# Altium PCB BLDC_driver.PcbDoc
Units mm, origin at the board's own origin, x right, y up, seen from the top; angles counter-clockwise.
Board outline 50 x 40 mm, 2 copper layers (Top Layer, Bottom Layer); 11 components, 13 nets, 44 pads, 32 vias.
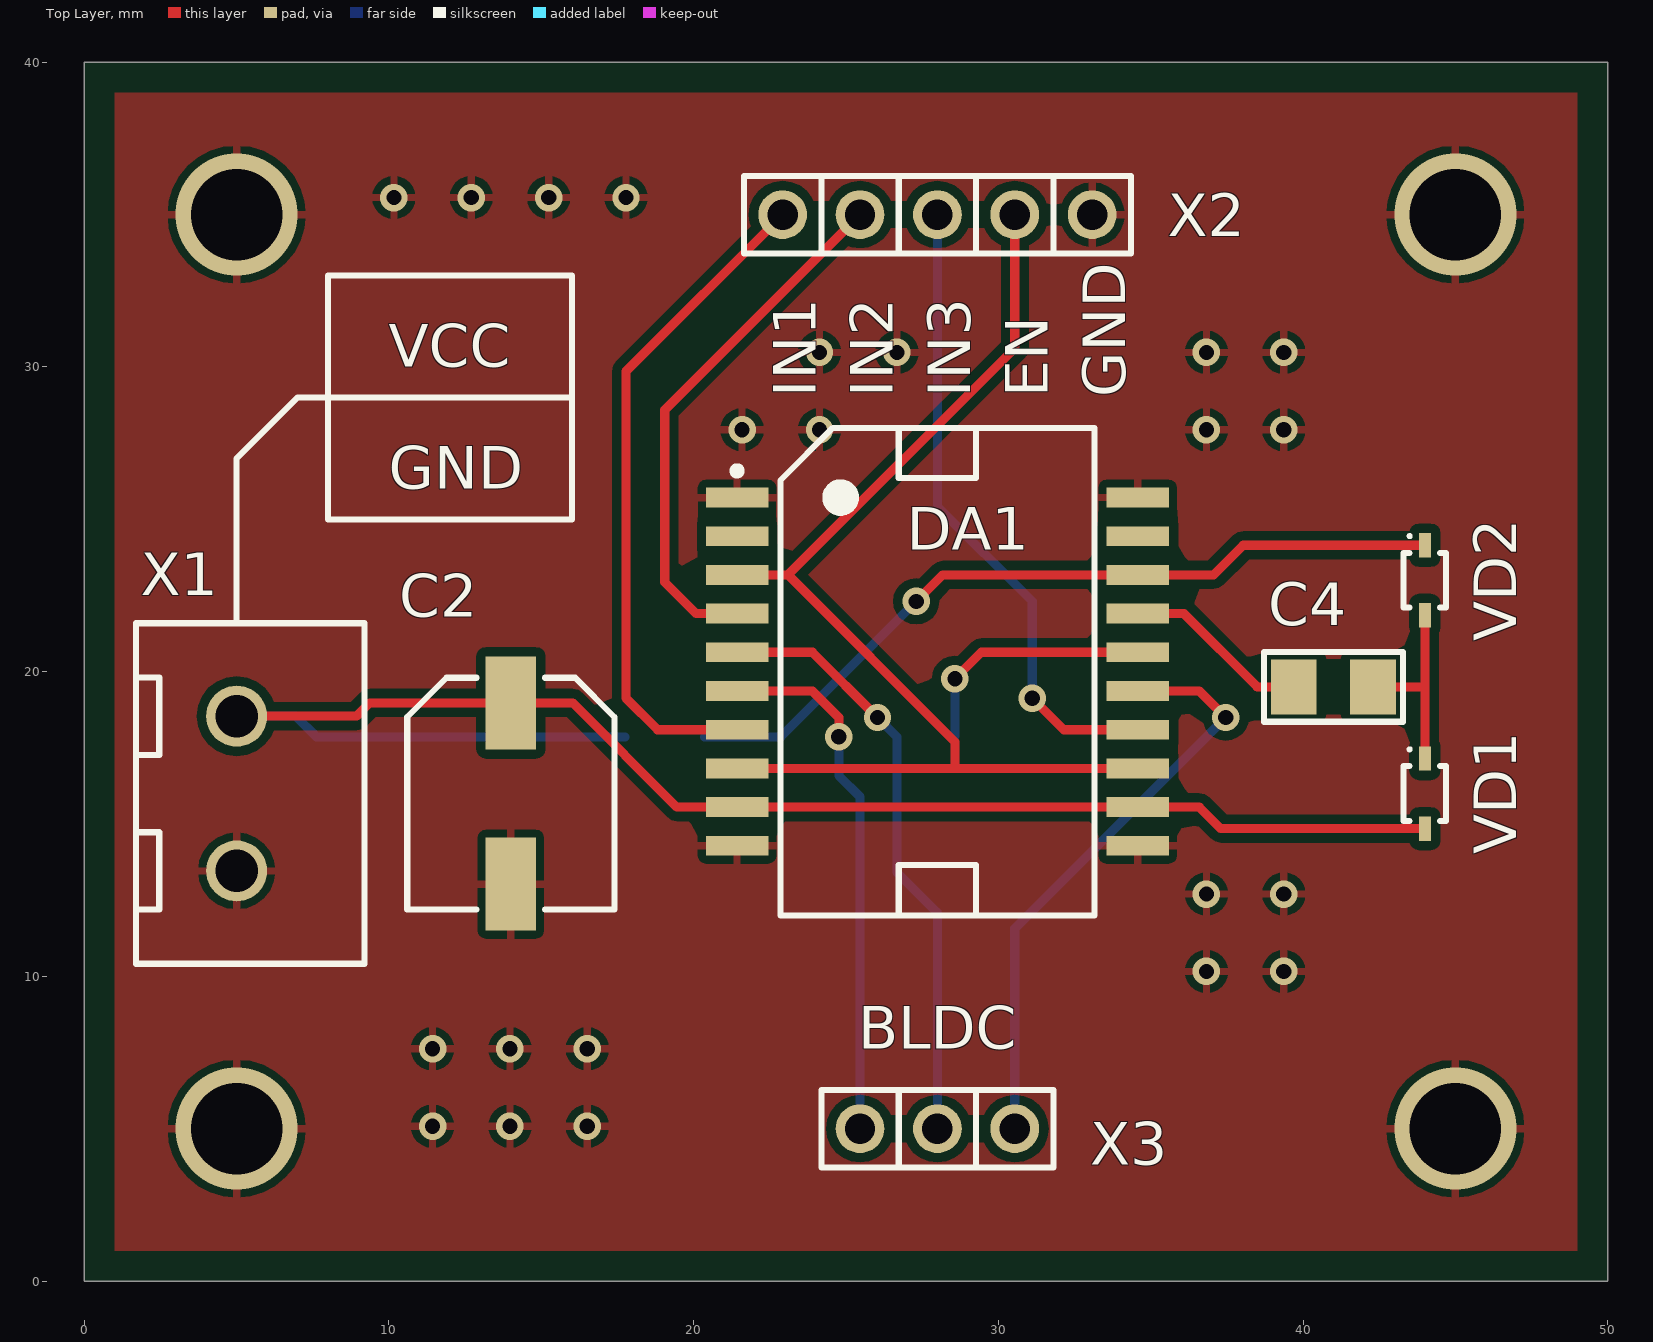
[diagram p0: Top Layer view]
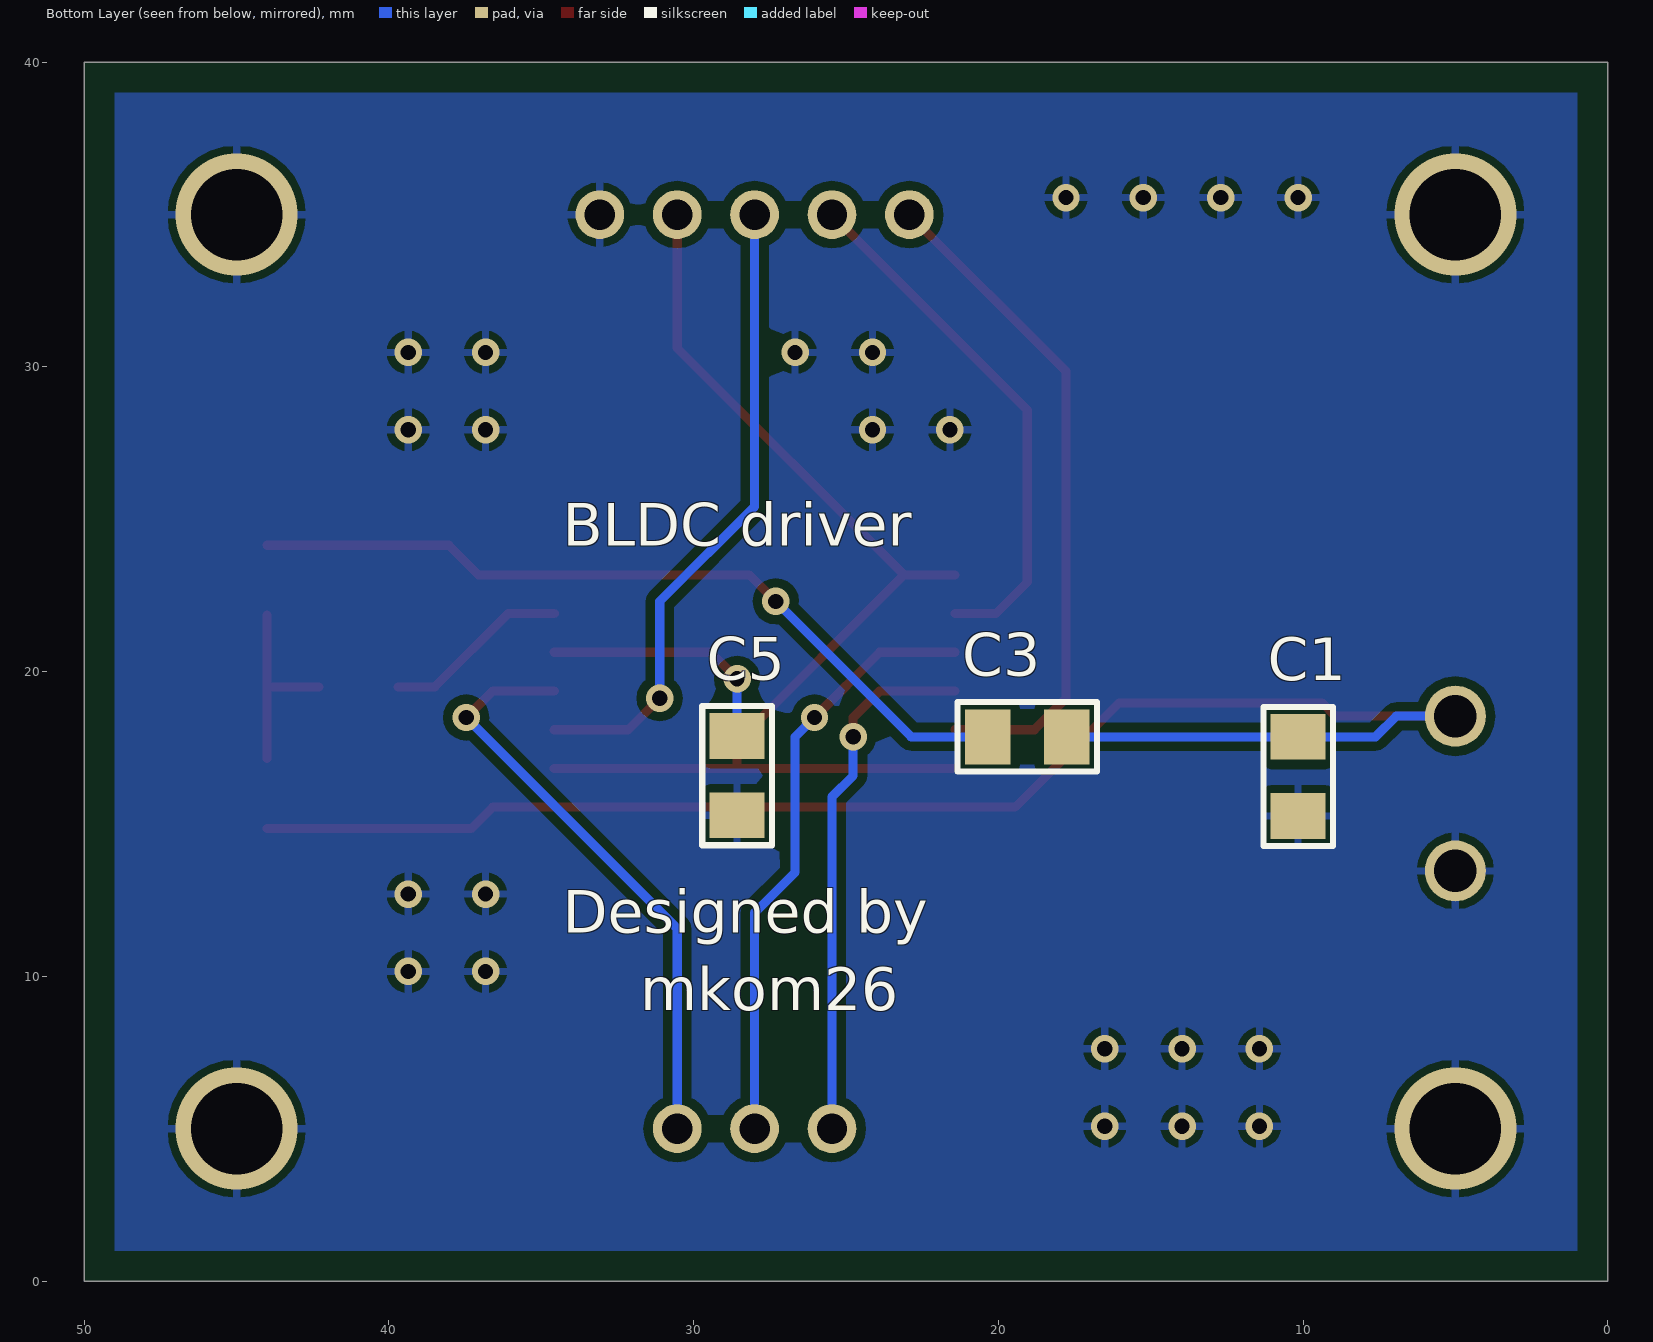
[diagram p1: Bottom Layer view, seen from below]

## Layer stack, top to bottom
Top Solder: solder mask 0.0102, Solder Resist, Dk 3.5
Top Layer: signal copper 0.0356
Dielectric 1: dielectric 0.32, FR-4, Dk 4.8
Bottom Layer: signal copper 0.0356
Bottom Solder: solder mask 0.0102, Solder Resist, Dk 3.5

## Board outline
0,0 50,0 50,40 0,40

## Design rules (kind name [scope] priority, off if disabled: settings)
Clearance [All] p1: gap=0.3 ignorepadtopadclearanceinfootprint=FALSE
HoleSize [All] p1: absolutevalues=TRUE maxlimit=3 minlimit=0.025 maxpercent=80.000 minpercent=20.000
PlaneConnect [All] p1: planeconnectstyle=Relief reliefexpansion=0.6 reliefentries=4 reliefconductorwidth=0.3 reliefairgap=0.3
PolygonConnect [All] p1: connectstyle=Relief reliefconductorwidth=0.254 reliefentries=4 polygonreliefangle="90 Angle" airgapwidth=0.254
RoutingVias [All] p1: holewidth=0.711 width=1.27 viastyle="Through Hole" minholewidth=0.711 minwidth=1.27 maxholewidth=3 maxwidth=4
SMDEntry [All] p1: side=TRUE corner=FALSE anyangle=FALSE
SilkToSolderMaskClearance [IsPad] p1: minsilkscreentomaskgap=0.1 clearancetoexposedcopper=TRUE
SolderMaskExpansion [All] p1: expansion=0.102
Width [All] p1: maxlimit=0.3 minlimit=0.3 preferedwidth=0.3
27 further rules are at their usual default settings.

## Components (designator, comment, footprint, x,y, rotation, side; value= is the part's Value field where it differs from the comment)
C1 "C_0.1uF" CAP_1206 10.16,16.56 r90 bottom
C2 "C_POL_100uF_25V" CAP_EL_100uF_25V 14,16 r270 top
C3 "C_0.22uF" CAP_1206 19.05,17.86 r0 bottom
C4 "C_10nF" CAP_1206 41,19.5 r0 top
C5 "C_1uF" CAP_1206 28.575,16.59 r90 bottom
DA1 "L6234PD" POWERSO-20 28,20 r0 top
VD1 "VD_1N4148WS" SOD323 44,16 r90 top
VD2 "VD_1N4148WS" SOD323 44,23 r90 top
X1 "TERMINAL_BLOCK" Terminal_Block_2x 5,16 r270 top
X2 "PLS5" PLS5 28,35 r0 top
X3 "PLS3" PLS3 28,5 r0 top

## Footprints (in the part's own frame and the unit in brackets; to place one, negate y for a bottom-side part, rotate by r counter-clockwise, add the part's x,y. Pads: shape width x height; smd on the part's side, far side on the other; paste and mask are expansions set on the pad)
CAP_1206 [mm] "Chip Capacitor, 2-Leads, Body 3,20x1,60mm, IPC Medium Density"
  rect 1.5x1.8 smd: 1(-1.3,0) 2(1.3,0)
  silkscreen extent -2.29,-1.14 2.29,1.14, body extent -1.7,-0.9 1.7,0.9, height 1.25
CAP_EL_100uF_25V [mm] "Aluminum Electrolytic Capacitor, Body 7,50x6,60x8,00mm, IPC Medium Density"
  rect 3.05x1.65 smd: 1(-2.975,0) 2(2.975,0)
  silkscreen extent -3.8,-3.4 3.8,3.4, body extent -3.9,-3.4 3.9,3.4, height 8
PLS3 [mm]
  round 1.6 hole 1: 1(-2.54,0) 2(0,0) 3(2.54,0)
  silkscreen extent -3.81,-1.27 3.81,1.27, body extent -3.81,-1.27 3.81,1.27, height 8.44
PLS5 [mm]
  round 1.6 hole 1: 1(-5.08,0) 2(-2.54,0) 3(0,0) 4(2.54,0) 5(5.08,0)
  silkscreen extent -6.35,-1.27 6.35,1.27, body extent -6.35,-1.27 6.35,1.27, height 8.44
POWERSO-20 [mm] "POWERSO, 20-Leads, Body 15,90x11,00mm, Pitch 1,27mm, IPC Medium Density"
  rect 2.05x0.65 smd: 1(-6.575,5.715) 2(-6.575,4.445) 3(-6.575,3.175) 4(-6.575,1.905) 5(-6.575,0.635) 6(-6.575,-0.635) 7(-6.575,-1.905) 8(-6.575,-3.175) 9(-6.575,-4.445) 10(-6.575,-5.715) 11(6.575,-5.715) 12(6.575,-4.445) 13(6.575,-3.175) 14(6.575,-1.905) 15(6.575,-0.635) 16(6.575,0.635) 17(6.575,1.905) 18(6.575,3.175) 19(6.575,4.445) 20(6.575,5.715)
  silkscreen extent -6.7,-8 5.15,8, body extent -7.21,-8 7.19,8, height 3.6
SOD323 [mm] "SOD323, 2-Leads, Body 1,30x2,50mm, IPC Medium Density"
  rect 0.8x0.4 smd: 1(-1.15,0) 2(1.15,0)
  silkscreen extent -0.9,-0.7 1.5,0.7, body extent -1.25,-0.7 1.25,0.7, height 1.05
Terminal_Block_2x [mm]
  round 2 hole 1.4: 1(-2.54,0) 2(2.54,0)
  silkscreen extent -5.59,-3.3 5.59,4.19, body extent -5.58,-3.31 5.58,4.19, height 10

## Via types
v1: diameter 0.9, hole 0.5, Top Layer to Bottom Layer, 28 vias
v2: diameter 4, hole 3, Top Layer to Bottom Layer, 4 vias

## Nets (pads, with @x,y where several pads share a name; then routed paths per layer and width w, separated by ;. In a path a pad name is that pad's centre, name@x,y a point inside that pad or via, vN(x,y) a via of type N, cw(c..) or ccw(c..) an arc to the next point about the centre after c; other vN are vias at no path point)
ENABLE: DA1.3 DA1.8 DA1.13 X2.4 | length 38.3
  Top Layer w0.3: DA1.8 28.575,16.825 ; DA1.3 23.095,23.175 ; X2.4 30.54,30.62 23.095,23.175 ; DA1.13 28.575,16.825 ; 23.095,23.175 28.575,17.695 28.575,16.825
GND: C1.1 C2.2 C5.1 DA1.1 DA1.10 DA1.11 DA1.20 X1.2 X2.5
  other v1: 11.43,5.08 13.97,5.08 16.51,5.08 11.43,7.62 13.97,7.62 16.51,7.62 36.83,10.16 39.37,10.16 36.83,12.7 39.37,12.7 21.59,27.94 24.13,27.94 36.83,27.94 39.37,27.94 24.13,30.48 26.67,30.48 36.83,30.48 39.37,30.48 10.16,35.56 12.7,35.56 15.24,35.56 17.78,35.56
  other v2: 5,5 45,5 5,35 45,35
IN1: DA1.7 X2.1 | length 22.1
  Top Layer w0.3: DA1.7 18.815,18.095 17.78,19.13 17.78,29.86 X2.1
IN2: DA1.4 X2.2 | length 17.5
  Top Layer w0.3: DA1.4 20.085,21.905 19.05,22.94 19.05,28.59 X2.2
IN3: DA1.14 X2.3 | length 21
  Top Layer w0.3: v1(31.115,19.13) 32.15,18.095 DA1.14
  Bottom Layer w0.3: X2.3 28,25.42 31.115,22.305 v1(31.115,19.13)
NetC3_2: C3.2 DA1.18 VD2.2 | length 26.3
  Top Layer w0.3: v1(27.305,22.305) 28.175,23.175 DA1.18 37.065,23.175 38.04,24.15 VD2.2
  Bottom Layer w0.3: C3.2 22.86,17.86 v1(27.305,22.305)
NetC4_1: C4.1 DA1.17 | length 6.1
  Top Layer w0.3: DA1.17 36.095,21.905 38.5,19.5 C4.1
NetC4_2: C4.2 VD1.2 VD2.1 | length 6.4
  Top Layer w0.3: C4.2 44,19.5 ; VD1.2 44,19.5 ; VD2.1 44,19.5
NetC5_2: C5.2 DA1.16 | length 8.2
  Top Layer w0.3: v1(28.575,19.765) 29.445,20.635 DA1.16
  Bottom Layer w0.3: C5.2 v1(28.575,19.765)
OUT1: DA1.6 X3.1 | length 17.5
  Top Layer w0.3: DA1.6 23.895,19.365 24.765,18.495 v1(24.765,17.86)
  Bottom Layer w0.3: v1(24.765,17.86) 24.765,16.59 25.46,15.895 X3.1
OUT2: DA1.5 X3.2 | length 19.8
  Top Layer w0.3: DA1.5 23.895,20.635 v1(26.035,18.495)
  Bottom Layer w0.3: v1(26.035,18.495) 26.67,17.86 26.67,13.415 28,12.085 X3.2
OUT3: DA1.15 X3.3 | length 19.6
  Top Layer w0.3: DA1.15 36.595,19.365 v1(37.465,18.495)
  Bottom Layer w0.3: X3.3 30.54,11.57 v1(37.465,18.495)
VCC: C1.2 C2.1 C3.1 DA1.9 DA1.12 VD1.1 X1.1 | length 53.9
  Top Layer w0.3: X1.1 8.935,18.54 9.37,18.975 C2.1 16.03,18.975 19.45,15.555 DA1.9 DA1.12 36.595,15.555 37.3,14.85 VD1.1
  Bottom Layer w0.3: X1.1 6.94,18.54 7.62,17.86 C1.2 C3.1
pads on no net: DA1.2 DA1.19

## Polygon pours and split planes (outlines as drawn)
GND on Bottom Layer "Bottom Layer-No Net" (solid, remove dead copper, pour order 4): 1,1 1,39 49,39 49,1
GND on Top Layer "Bottom Layer-No Net" (solid, remove dead copper, pour order 6): 1,1 49,1 49,39 1,39

## Silkscreen, mask and mechanical layers (free items; w line width, h text height)
Top Overlay:
  lines w0.2: 5,21.588 5,27 7,29 8,29 16,29 ; 8,25 8,27 8,33 16,33 16,25 8,25
  text "VCC" at 10,30 h1.4
  text "IN1" at 24,29 h1.4 r90
  text "IN2" at 26.54,29 h1.4 r90
  text "IN3" at 29.08,29 h1.4 r90
  text "EN" at 31.62,29 h1.4 r90
  text "GND" at 34.16,29 h1.4 r90
  text "GND" at 10,26 h1.4
  text "BLDC" at 25.4,7.62 h1.4
Bottom Overlay:
  text "BLDC driver" at 34.29,24.13 h1.4
  text "Designed by" at 34.29,11.43 h1.4
  text "mkom26" at 31.75,8.89 h1.4
Board:
  the board outline again, w0.254